# Altium PCB PCB1.PcbDoc
Units mil, origin at the board's own origin, x right, y up, seen from the top; angles counter-clockwise.
Board outline 3630.03 x 1635.03 mil, 2 copper layers (Top Layer, Bottom Layer); 20 components, 14 nets, 46 pads, 0 vias.
Unrouted connection lines stored in the file: 4.
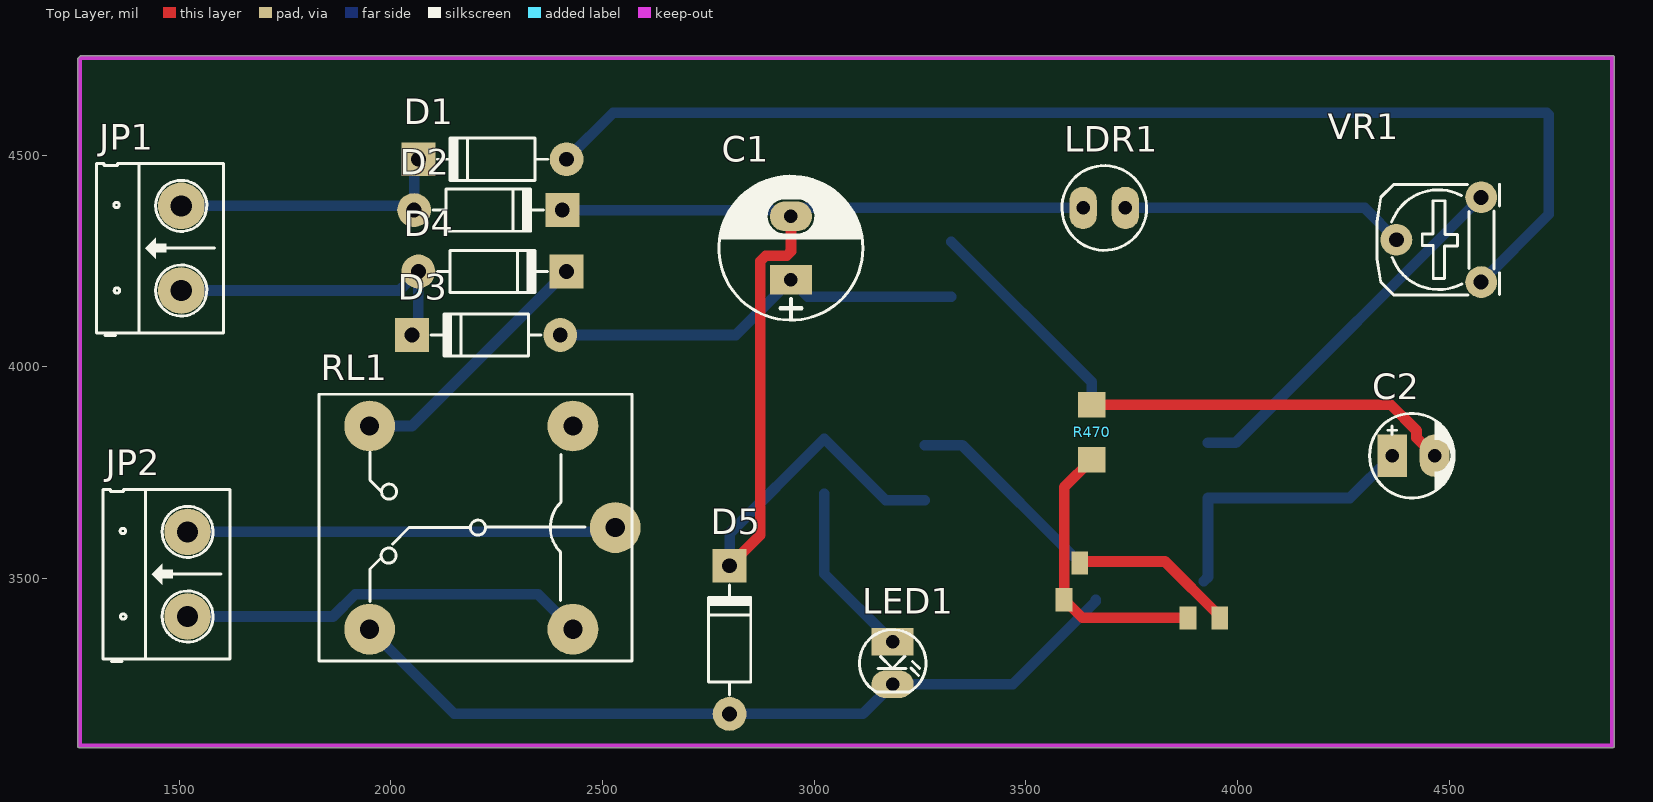
[diagram p0: Top Layer view]
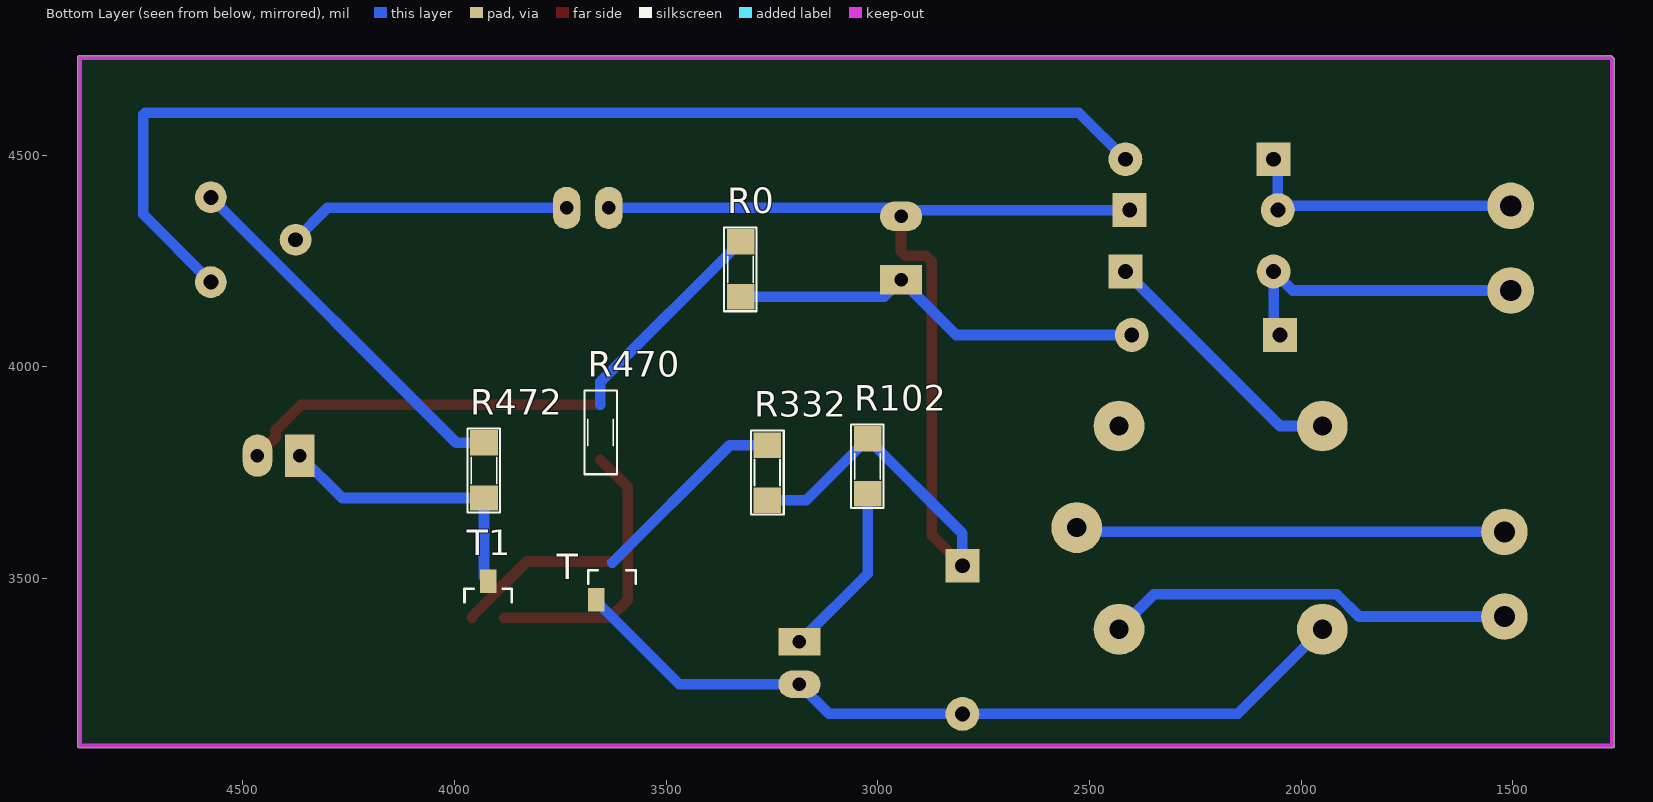
[diagram p1: Bottom Layer view, seen from below]
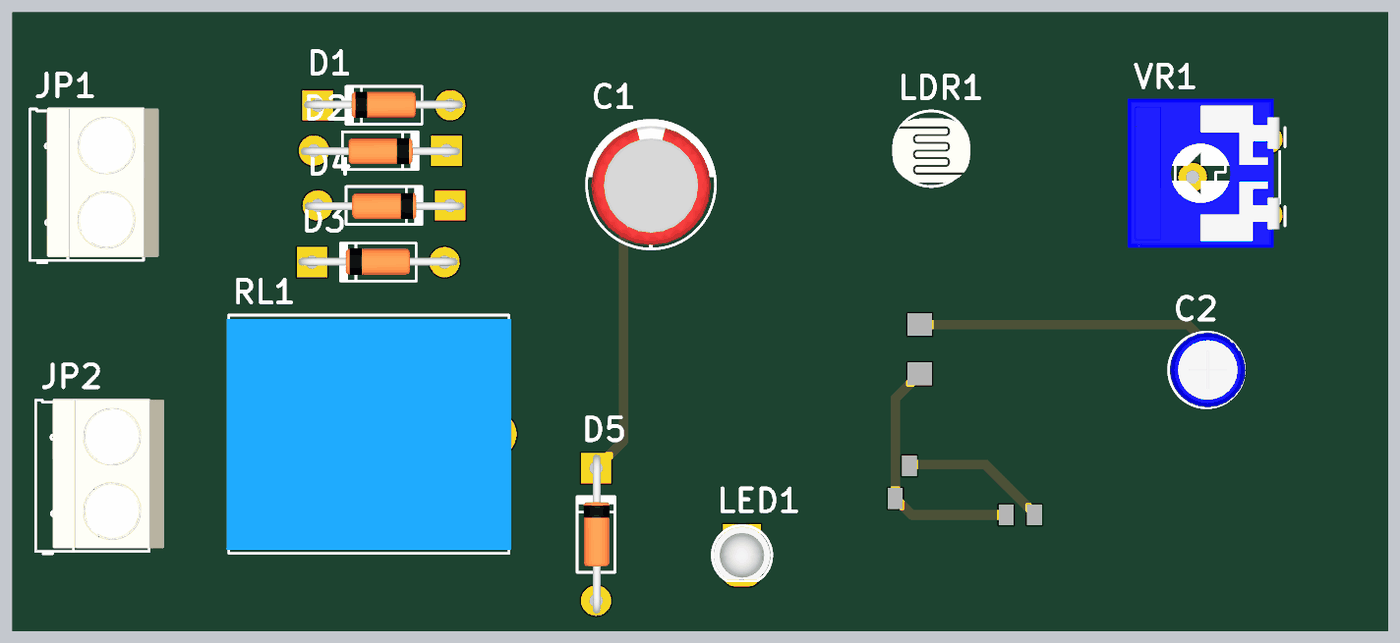
[diagram p2: 3D render of the assembled board from above, using the file's embedded part models]
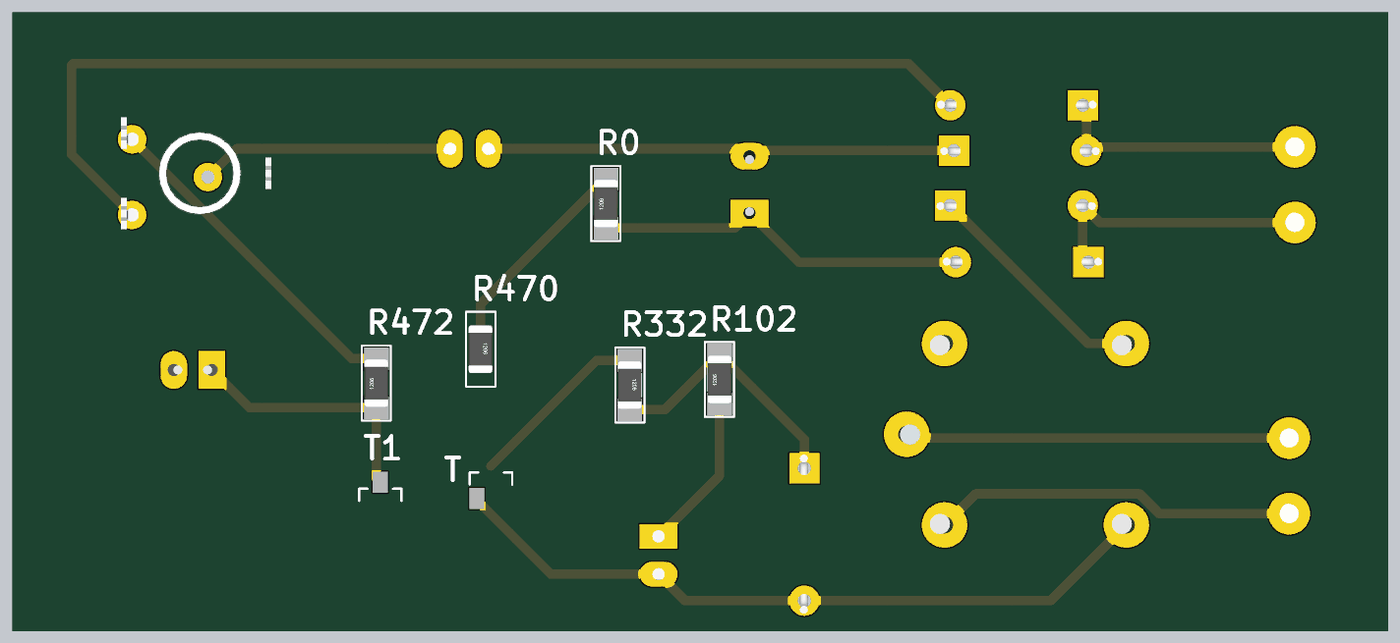
[diagram p3: 3D render of the assembled board from below, using the file's embedded part models]

## Layer stack, top to bottom
Top Solder: solder mask 0.4, Solder Resist, Dk 3.5
Top Layer: signal copper 1.4
Dielectric 1: dielectric 12.6, FR-4, Dk 4.8
Bottom Layer: signal copper 1.4
Bottom Solder: solder mask 0.4, Solder Resist, Dk 3.5

## Board outline
1265,3099.99 cw(c1265,3105) 1259.98,3105 1259.98,4725 cw(c1265,4725) 1261.47,4728.56 1261.45,4728.55 1266.45,4733.55 1266.44,4733.53 cw(c1270,4730) 1270,4735.02 4885,4735.02 cw(c4885,4730) 4890.02,4730 4890.02,3105 cw(c4885,3105) 4885,3099.99

## Design rules (kind name [scope] priority, off if disabled: settings)
Clearance [All] p1: gap=10 ignorepadtopadclearanceinfootprint=FALSE except(0: Arc-Hole Track-Hole SMDPad-Hole THPad-Hole Via-Hole Fill-Hole Poly-Hole Region-Hole Text-Hole)
PolygonConnect [All] p1: connectstyle=Relief reliefconductorwidth=10 reliefentries=4 polygonreliefangle="90 Angle" airgapwidth=10
RoomDefinition Sheet1 [InComponentClass('Sheet1')] p1: confinementstyle=ConfineIn formatcopy=TRUE lockcomponents=FALSE outline 7045,1055 11825,1055 11825,1940 7045,1940
RoutingVias [All] p1: holewidth=28 width=50 viastyle="Through Hole" minholewidth=28 minwidth=50 maxholewidth=28 maxwidth=50
SolderMaskExpansion [All] p1: expansion=4
Width [All] p1: maxlimit=25 minlimit=25 preferedwidth=25
30 further rules are at their usual default settings.

## Components (designator, comment, footprint, x,y, rotation, side; value= is the part's Value field where it differs from the comment)
C1 "1000uF/16V" CP1.5/3.4 2945,4205 r90 top
C2 "10uF" CP1/2 4365,3790 r0 top value=10uF/50V
D1 "1N4007" D1A 2415,4490 r0 top
D2 "1N4007" D1A 2055,4370 r180 top
D3 "1N4007" D1A 2400,4075 r0 top
D4 "1N4007" D1A 2065,4225 r180 top
D5 "1N4007" D1A 2800,3180 r270 top
JP1 "Header 2_1" HED2 1505,4180 r90 top value="Header 2"
JP2 "Header 2_1" HED2 1520,3410 r90 top value="Header 2"
LDR1 "LDR" CDS 3735,4375 r180 top
LED1 "LED" LED-3 3185,3350 r270 top value="LED 3 ly Single Colour"
R0 "1k" SM-RES-1206#1 3324,4165 r90 bottom value="R1/4W - 1K"
R102 "1k" SM-RES-1206#1 3024,3700 r90 bottom value="R1/4W - 1K"
R332 "1k" SM-RES-1206#1 3261,3815 r270 bottom value="R1/4W - 1K"
R470 "1k" SM-RES-1206#2 3655,3910 r270 bottom value="R1/4W - 1K"
R472 "1k" SM-RES-1206#1 3930,3690 r90 bottom value="R1/4W - 1K"
RL1 "Relay 10A/12V" RL_SPDT_10A 2530,3620 r180 top value="Relay SPDT, 10A, 12V"
T "BC858C" SOT23#1 3627.4,3493.31 r180 bottom
T1 "BC858C" SOT23#2 3920,3450 r180 bottom
VR1 "10K" VR 4575,4200 r90 top value="VR 10K"

## Footprints (in the part's own frame and the unit in brackets; to place one, negate y for a bottom-side part, rotate by r counter-clockwise, add the part's x,y. Pads: shape width x height; smd on the part's side, far side on the other; paste and mask are expansions set on the pad)
CDS [mil] "QUANG TRO"
  oval 65x100 hole 32: 1(0,0) 2(100,0)
  silkscreen extent -50,-100 150,100, body extent -53,-80 153,89, height 138
CP1.5/3.4 [mil] "Tu hoa 220->470uF,16V, 470uF/16V,25V"
  rect 70x100 hole 32: 1(0,0)
  oval 70x100 hole 32: 2(150,0)
  silkscreen extent -95,-170 245,170, body extent -85,-157 230,157, height 446
CP1/2 [mil] "Tu hoa < 22uF/16>50V"
  rect 70x100 hole 32: 1(0,0)
  oval 70x100 hole 32: 2(100,0)
  silkscreen extent -53,-100 147,100, body extent -49,-99 149,99, height 287
D1A [mil] "Diode 1A, W 100mil, L 350mil"
  round 80 hole 35: 1(0,0)
  rect 80x80 hole 35: 2(-350,0)
  silkscreen extent -305,-50 -45,50, body extent -386,-33 34,36, height 84
HED2 [mil] "Header 2, 2 pin, hight 300mil, Pin to Pin 200, Colour Green"
  round 110 hole 50: 1(0,0) 2(200,0)
  silkscreen extent -106,-100 300,200, body extent -92,-140 302,155, height 394
LED-3 [mil] "LED 2 PIN, 3ly Only colour"
  rect 65x100 hole 32: 1(0,0)
  oval 65x100 hole 32: 2(100,0)
  silkscreen extent -29,-78 118,79, body extent -25,-75 113,75, height 217
RL_SPDT_10A [mil] "Relay SPDT, 5 pin, 10A,W 650mil, L 800mil, H 800mil"
  round 120 hole 45: 1(0,0) 2(580,240) 3(580,-240) 4(100,-240) 5(100,240)
  silkscreen extent -40,-315 700,315, body extent -46,-304 706,306, height 602
SM-RES-1206#1 [mil]
  rect 60x65 smd: 1(0,0) 2(130,0)
  silkscreen extent -34,-38 164,39, body extent 2,-31 128,31, height 40
SM-RES-1206#2 [mil]
  rect 60x65 smd far side: 1(0,0) 2(130,0)
  silkscreen extent -34,-38 164,39, body extent 2,-31 128,31, height 40
SOT23#1 [mm]
  rect 1x1.4 smd: 1(-0.95,-1.1)
  rect 1x1.4 smd far side: 2(0.95,-1.1) 3(0,1.1)
  silkscreen extent -1.42,-0.15 1.42,0.66
SOT23#2 [mm]
  rect 1x1.4 smd far side: 1(-0.95,-1.1) 2(0.95,-1.1)
  rect 1x1.4 smd: 3(0,1.1)
  silkscreen extent -1.42,-0.15 1.42,0.66
VR [mil] "Resistor Variable"
  round 75 hole 35: 1(0,0) 2(100,200) 3(200,0)
  silkscreen extent -31,-44 231,246, body extent -87,-30 307,372, height 165

## Part data
C1: library part CP4, "Cap 1000uF/16V - 220uF/50V", Description 1="2200uF-3300uF/6,3V - 1000uF-2200uF/10V", Description 2="1000uF/16V - 470uF => 1000uF/25V - 100uF/100V", Description 3=330uF>470uF/35V_220uF>470uF/50V_10uF>22uF/250V, Description 4="220uF => 330uF/63V - 10uF =>33uF/160 - 200V", Description 5="4,7uF>10uF/250V_3,3uF>10uF/400V - 2,2uF>4,7uF/450V"
C2: library part CP1, "Cap P  0,1uF < 22uF , 16 - 50V", Description 1="10 => 220uF/6,3V/10V - 10uF => 100uF/16V", Description 2="0,1uF => 33uF/50V - 10uF => 22uF/63V", Description 3="0,47uF => 10uF/100V"
D1 D2 D3 D4 D5: library part D1A, "Diode 1A"
JP1 JP2: "Header, 2-Pin", Manufacturer="Generic Components", Class=Connector
LDR1: "Quang Tro"
LED1: "LED Single colour Green and Red"
R0 R102 R332 R470 R472: library part R, "Resistor 1/4W"
RL1: library part "Relay 1", "Relay SPDT,10A - 12VDC 5 Pin", ="Relay SPDT, 10A, 24V"
T T1: "Bipolar _BJT_ Transistor PNP 30V 100mA 150MHz 310mW Surface Mount SOT-23-3", Package="SOT-23 Diotec", Availability=Unavailable, MF="ON Semiconductor", MP=BC858C, Price=None, SnapEDA_Link=https://www.snapeda.com/parts/BC858C/ON%20Semiconductor/view-part/885150/?ref=snap
VR1: library part VR1, "Var Resistor"

## Nets (pads, with @x,y where several pads share a name; then routed paths per layer and width w, separated by ;. In a path a pad name is that pad's centre, name@x,y a point inside that pad or via, vN(x,y) a via of type N, cw(c..) or ccw(c..) an arc to the next point about the centre after c; other vN are vias at no path point)
GND: C1.1 D1.1 D3.1 R0.1 VR1.1 | length 3823.3
  Bottom Layer w25: D3.1 2815,4075 C1.1 2985,4165 R0.1 ; D1.1 2525,4600 4730,4600 4735,4595 4735,4360 VR1.1
NetC1_2: C1.2 D2.2 D4.2 D5.2 LDR1.2 R102.2 R332.2 RL1.3 | length 3464.3
  Top Layer w25: D5.2 2872.5,3602.5 2872.5,4249.32 2885.68,4262.5 2934.68,4262.5 2945,4272.82 C1.2
  Bottom Layer w25: RL1.3 2050,3860 D4.2 ; D2.2 2930,4370 C1.2 2965,4375 LDR1.2 ; D5.2 2800,3606 R102.2 3169,3685 R332.2
NetC2_1: C2.1 R472.1 T1.3 | length 677.3
  Bottom Layer w25: T1.3 3930,3503.31 R472.1 4265,3690 C2.1
NetC2_2: C2.2 R0.2 R470.1 | length 1391.7
  Top Layer w25: R470.1 4361.82,3910 4422.5,3849.32 4422.5,3832.5 C2.2
  Bottom Layer w25: R0.2 3655,3964 3655,3910
NetD1_2: D1.2 D2.1 JP1.2 | length 678.3
  Bottom Layer w25: JP1.2 2045,4380 D2.1 2055,4480 D1.2
NetD3_2: D3.2 D4.1 JP1.1 | length 734.9
  Bottom Layer w25: JP1.1 2020,4180 D4.1 2065,4090 D3.2
NetD5_1: D5.1 LED1.2 RL1.2 T.1 | length 1912
  Bottom Layer w25: RL1.2 2150,3180 D5.1 3115,3180 LED1.2 3469.06,3250 3664.8,3445.74 T.1
NetJP2_1: JP2.1 RL1.5 | length 965.9
  Bottom Layer w25: JP2.1 1863.33,3410 1915.83,3462.5 2347.5,3462.5 RL1.5
NetJP2_2: JP2.2 RL1.1 | length 1014.1
  Bottom Layer w25: JP2.2 2520,3610 RL1.1
NetLDR1_1: LDR1.1 VR1.2 | length 671.1
  Bottom Layer w25: LDR1.1 4300,4375 VR1.2
NetLED1_1: LED1.1 R102.1 | length 416.7
  Bottom Layer w25: R102.1 3024,3511 LED1.1
NetR332_1: R332.1 T1.1 T.3 | length 870.8
  Top Layer w25: T.3 3630.79,3540 3828.36,3540 3957.4,3410.95 T1.1
  Bottom Layer w25: R332.1 3349.02,3815 3627.4,3536.61
NetR470_2: R470.2 T1.2 T.2 | length 667.5
  Top Layer w25: R470.2 3590,3715 T.2 3633.31,3406.69 T1.2
NetR472_2: R472.2 VR1.3 | length 885.2
  Bottom Layer w25: R472.2 3995,3820 VR1.3
pads on no net: RL1.4

## Keep-outs
Keep-Out Layer:
  lines w10: 1265,3105 4885,3105 4885,4730 1270,4730 1265,4725 1265,4705 1265,3105